# Altium PCB board.PcbDoc
Units mil, origin at the board's own origin, x right, y up, seen from the top; angles counter-clockwise.
Board outline 810 x 1460 mil, 2 copper layers (Top Layer, Bottom Layer); 9 components, 12 nets, 40 pads, 3 vias.
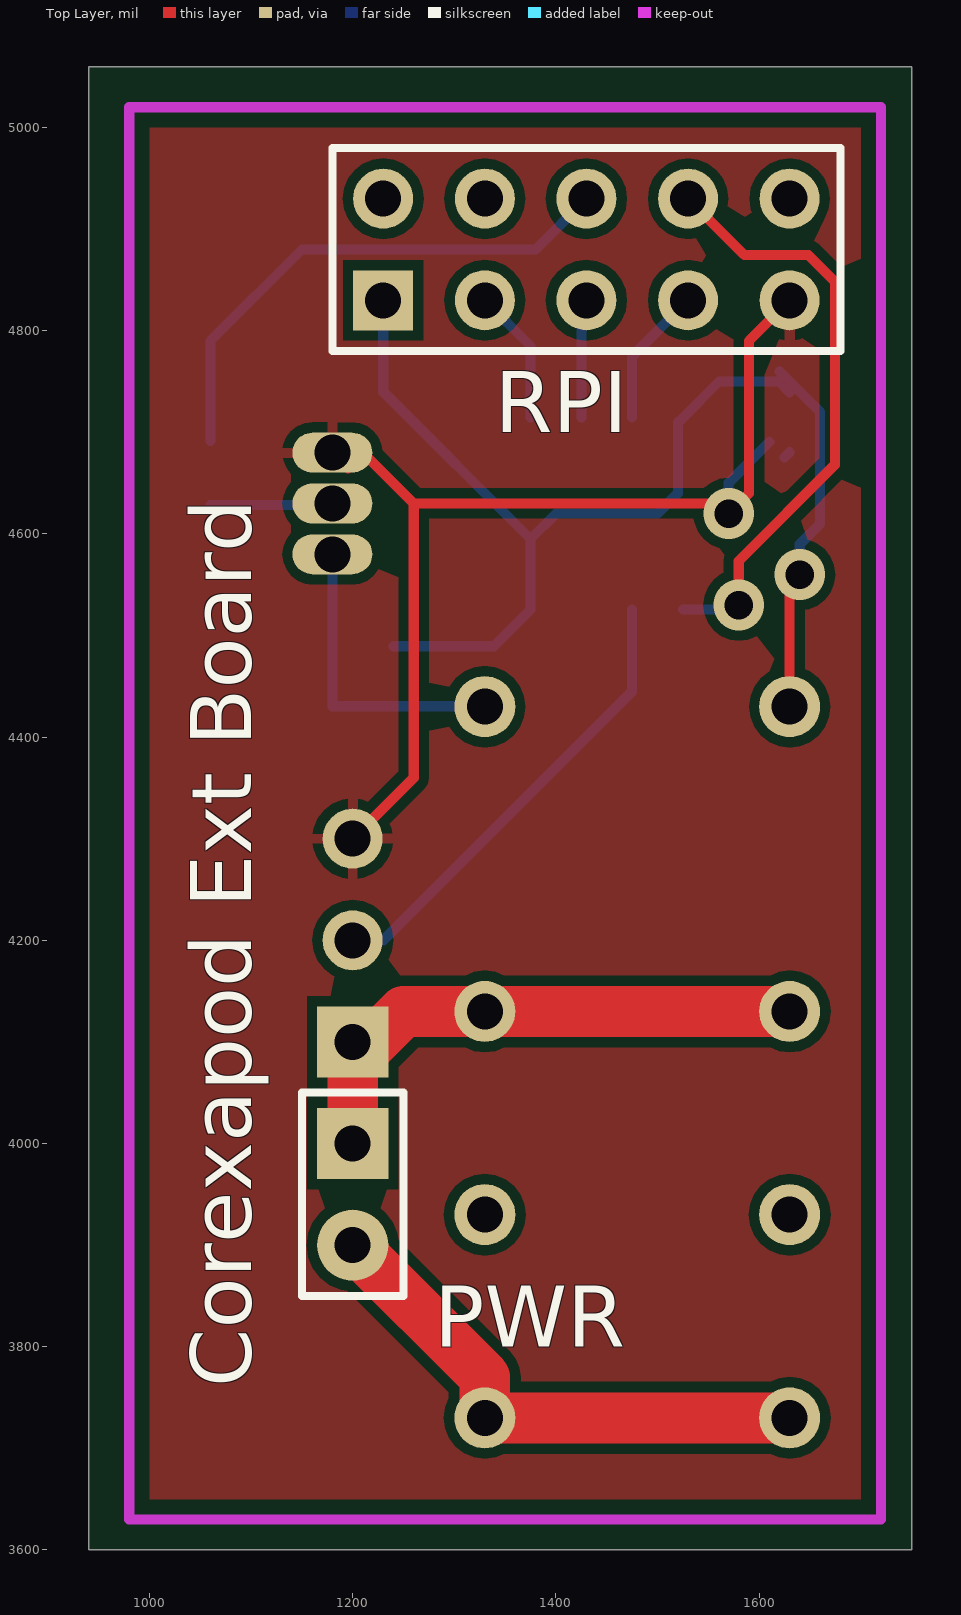
[diagram p0: Top Layer view]
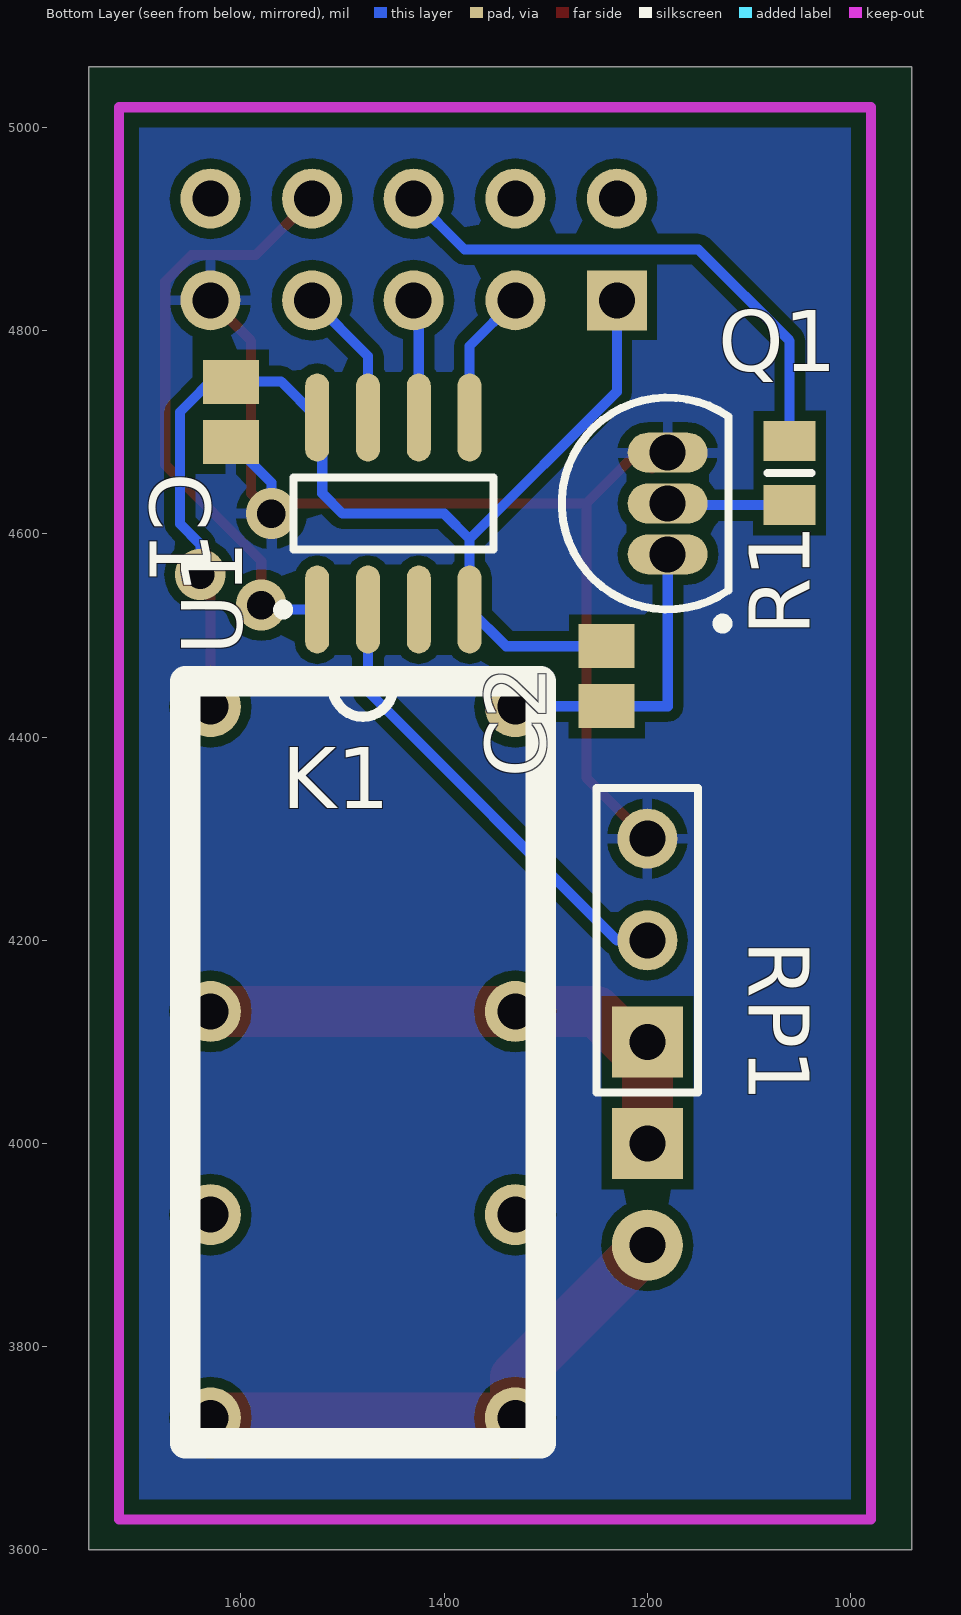
[diagram p1: Bottom Layer view, seen from below]

## Layer stack, top to bottom
Top Layer: signal copper 1.4
Dielectric: dielectric 12.6, FR-4, Dk 4.8
Bottom Layer: signal copper 1.4

## Board outline
940,5060 940,3600 1750,3600 1750,5060

## Design rules (kind name [scope] priority, off if disabled: settings)
Clearance [All] p1: gap=10
PolygonConnect [All] p1: connectstyle=Relief reliefconductorwidth=10 reliefentries=4 polygonreliefangle="90 Angle" airgapwidth=10
RoutingVias [All] p1: holewidth=28 width=50 viastyle="Through Hole" minholewidth=28 minwidth=50 maxholewidth=28 maxwidth=50
SolderMaskExpansion [All] p1: expansion=4
Width [All] p1: maxlimit=100 minlimit=10 preferedwidth=10
28 further rules are at their usual default settings.

## Components (designator, comment, footprint, x,y, rotation, side; value= is the part's Value field where it differs from the comment)
C1 "Cap" C0805 1610,4720 r270 bottom
C2 "Cap" C0805 1240,4460 r270 bottom
K1 "JRC-19F/05VDC-2ZS" Relay-DPDT 1630,4430 r180 bottom
PWR "BATTERY" HDR1X2 1200,4000 r270 top (schematic designator P1)
Q1 "NPN" TO-226-AA 1180,4630 r180 bottom
R1 "Res3" 6-0805_L 1060,4660 r270 bottom
RP1 "RPot" HDR1X3 1200,4100 r90 bottom
RPI "HEADER" HDR2X5 1230,4830 r0 top (schematic designator P2)
U1 "MCP3002-I/SN" SOIC-SN8_N 1450,4620 r90 bottom

## Footprints (in the part's own frame and the unit in brackets; to place one, negate y for a bottom-side part, rotate by r counter-clockwise, add the part's x,y. Pads: shape width x height; smd on the part's side, far side on the other; paste and mask are expansions set on the pad)
6-0805_L [mm] "Chip Resistor, Body 2.0x1.2mm, IPC High Density"
  rect 1x1.3 smd: 1(-0.8,0) 2(0.8,0)
  silkscreen extent 0,-0.55 0,0.55, body extent -1.07,-0.7 1.07,0.7, height 0.7
C0805 [mm] "Chip Capacitor, Body 2.0x1.3mm, IPC High Density"
  rect 1.1x1.4 smd: 1(-0.75,0) 2(0.75,0)
  body extent -1.1,-0.72 1.1,0.72, height 1.4
HDR1X2 [mil] "Connector; Header; 2 Position"
  rect 70x70 hole 35.43: 1(0,0)
  round 70 hole 35.43: 2(100,0)
  silkscreen extent -50,-50 150,50
HDR1X3 [mm] "Connector; Header; 3 Position"
  rect 1.778x1.778 hole 0.9: 1(0,0)
  round 1.5 hole 0.9: 2(2.54,0) 3(5.08,0)
  silkscreen extent -1.27,-1.27 6.35,1.27
HDR2X5 [mm] "Connector; Header; 5x2 Position"
  rect 1.5x1.5 hole 0.9: 1(0,0)
  round 1.5 hole 0.9: 2(0,2.54) 3(2.54,0) 4(2.54,2.54) 5(5.08,0) 6(5.08,2.54) 7(7.62,0) 8(7.62,2.54) 9(10.16,0) 10(10.16,2.54)
  silkscreen extent -1.27,-1.27 11.43,3.81
Relay-DPDT [mil]
  round 60 hole 35.5: 1(0,0) 2(0,-300) 3(0,-500) 4(0,-700) 5(300,-700) 6(300,-500) 7(300,-300) 8(300,0)
  silkscreen extent -25,-725 325,25
SOIC-SN8_N [mm] "SOIC, 8-Leads, Body 4.9x3.8mm, Pitch 1.27mm, IPC Medium Density"
  oval 2.2x0.6 smd: 1(-2.4,1.905) 2(-2.4,0.635) 3(-2.4,-0.635) 4(-2.4,-1.905) 5(2.4,-1.905) 6(2.4,-0.635) 7(2.4,0.635) 8(2.4,1.905)
  silkscreen extent -2.52,-2.5 0.9,2.88, body extent -2,-2.5 2,2.5, height 1.75
TO-226-AA [mm] "TO, Flat Index; 3 In-Line, Axial Leads; Body Dia. 4.8mm; Leads 0.55 x 0.51 mm (max)"
  oval 2x1 hole 0.9: 1(0,-1.27) 2(0,0) 3(0,1.27)
  silkscreen extent -2.65,-3.13 1.52,2.65, body extent -2.66,-2.66 1.52,2.66, height 5.33

## Part data
C1 C2: "Capacitor"
K1: library part Relay-DPDT
PWR: library part "Header 2", "Header, 2-Pin"
Q1: "NPN Bipolar Transistor"
R1: "Resistor"
RP1: "Potentiometer"
RPI: library part "Header 5X2", "Header, 5-Pin, Dual row"
U1: "2.7V Dual Channel 10-Bit A/D Converter with SPI Serial Interface, 8-Pin SOIC 150mil, Industrial Temperature"

## Via types
v1: diameter 50, hole 28, Top Layer to Bottom Layer, 3 vias

## Nets (pads, with @x,y where several pads share a name; then routed paths per layer and width w, separated by ;. In a path a pad name is that pad's centre, name@x,y a point inside that pad or via, vN(x,y) a via of type N, cw(c..) or ccw(c..) an arc to the next point about the centre after c; other vN are vias at no path point)
3V3: C1.1 C2.1 K1.1 RPI.1 U1.4 U1.8 | length 1223.2
  Top Layer w10: K1.1 v1@1630,4550
  Bottom Layer w10: RPI.1 1230,4740 1375,4595 ; C2.1 1339.02,4489.53 U1.4 1375,4595 ; C1.1@1620.24,4759.76 1660,4720 1660,4610 1640,4590 v1(1640,4560) ; C1.1@1630,4739.53 1619.53,4750 1560.51,4750 U1.8 1520,4709.49 1520,4640 1500,4620 1400,4620 1375,4595
CE0: RPI.8 U1.1 | length 566.4
  Top Layer w10: RPI.8 1585.47,4874.53 1648.44,4874.53 1674.53,4848.44 1674.53,4667.96 1580,4573.43 v1(1580,4530)
  Bottom Layer w10: U1.1 v1@1555.51,4525.51
GND: C1.2 Q1.3 RP1.3 RPI.9 | length 1075.3
  Top Layer w10: Q1.3@1195.32,4664.69 1210.32,4679.69 1260,4630 ; RP1.3 1260,4360 1260,4630 ; v1@1560,4630 1260,4630 ; v1(1570,4620) 1590,4640 1590,4790 RPI.9
  Bottom Layer w10: v1(1570,4620) 1570,4650.47 C1.2 ; C1.2@1625,4675.47 C1.2@1630,4680.47
GPIO25: R1.1 RPI.6 | length 526.5
  Bottom Layer w10: R1.1 1060,4790 1150,4880 1380,4880 RPI.6
MISO: RPI.5 U1.6 | length 117.6
  Bottom Layer w10: U1.6 1425,4825 RPI.5
MOSI: RPI.3 U1.5 | length 134.2
  Bottom Layer w10: RPI.3 1375,4785 U1.5
NetC2_2: C2.2 K1.8 Q1.1 | length 299.7
  Bottom Layer w10: Q1.1 1180,4430.47 C2.2 1329.53,4430.47 K1.8
NetQ1_2: Q1.2 R1.2 | length 118.5
  Bottom Layer w10: R1.2 Q1.2@1178.5,4628.5
NetRP1_3: RP1.2 U1.2 | length 457
  Bottom Layer w10: RP1.2 1230,4200 1475,4445 U1.2
PWR: K1.2 K1.7 PWR.1 RP1.1 | length 542.4
  Top Layer w50: PWR.1 RP1.1 1220,4100 1250,4130 K1.7 K1.2
SCLK: RPI.7 U1.7 | length 138.3
  Bottom Layer w10: U1.7 1475,4775 RPI.7
SERVO: K1.4 K1.5 PWR.2 | length 523.8
  Top Layer w50: PWR.2 1330,3770 K1.5 K1.4
pads on no net: K1.3 K1.6 RPI.2 RPI.4 RPI.10 U1.3

## Polygon pours and split planes (outlines as drawn)
GND on Top Layer "Bottom Layer-No Net" (solid, remove dead copper, pour order 2): 1000,5000 1000,3650 1700,3650 1700,5000 1000,5000
GND on Bottom Layer "Bottom Layer-No Net" (solid, remove dead copper, pour order 4): 1000,5000 1000,3650 1700,3650 1700,5000 1000,5000

## Keep-outs
Keep-Out Layer:
  lines w10: 980,3630 1720,3630 1720,5020 980,5020 980,3630

## Silkscreen, mask and mechanical layers (free items; w line width, h text height)
Top Overlay:
  text "Corexapod Ext Board" at 1100,3760 h60 r90